# Altium PCB УШЯИ 758727.205.PcbDoc (part 3 of 3)
Units mm, origin at the board's own origin, x right, y up, seen from the top; angles counter-clockwise.
Board outline 230 x 150 mm, 2 copper layers (Top Layer, Bottom Layer), stack 1.57 mm thick; 312 components, 192 nets, 1030 pads, 332 vias.
Unrouted connection lines stored in the file: 2.
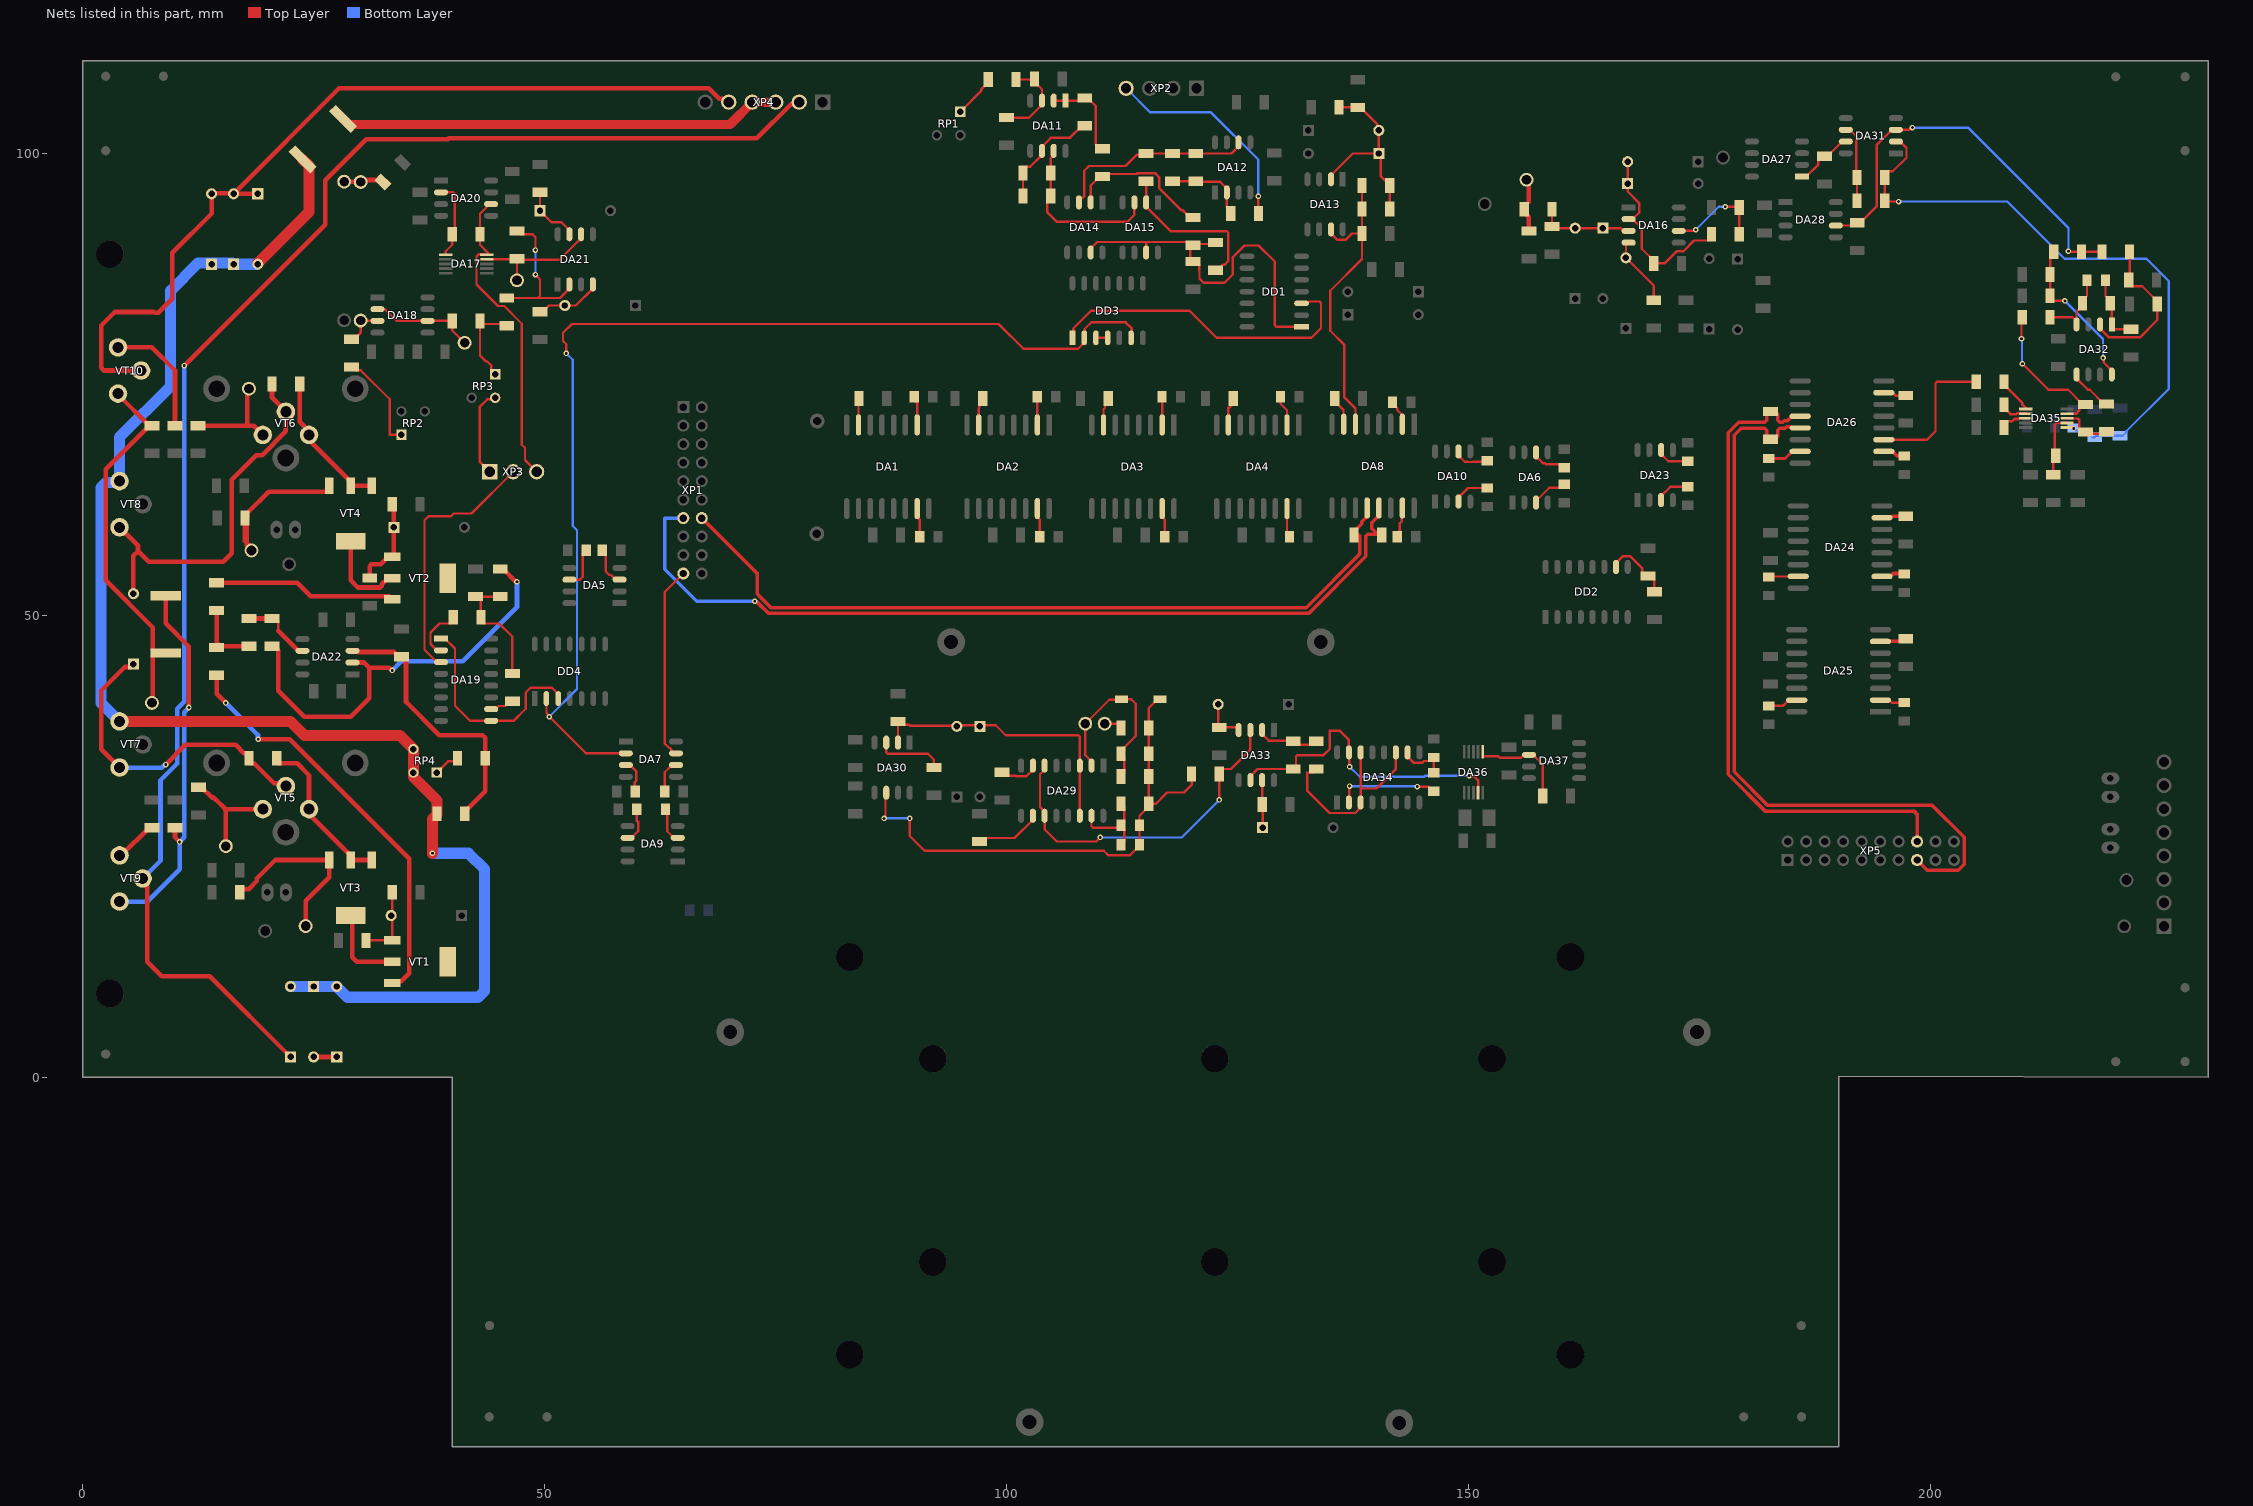
[diagram p3: the nets of this part, all layers, seen from the top]

## Via types
v1: diameter 0.6, hole 0.3, Top Layer to Bottom Layer, 328 vias
v2: diameter 0.5, hole 0.3, Top Layer to Bottom Layer, 3 vias
v3: diameter 1.6, hole 0.9, Top Layer to Bottom Layer, 1 vias

## Nets (pads, with @x,y where several pads share a name; then routed paths per layer and width w, separated by ;. In a path a pad name is that pad's centre, name@x,y a point inside that pad or via, vN(x,y) a via of type N, cw(c..) or ccw(c..) an arc to the next point about the centre after c; other vN are vias at no path point) (continued)
LINE: C24.2 DA8.6 DA13.7 R16.2 R19.1 | length 32.8
  Top Layer w0.254: DA13.7@135.081,91.736 135.081,91.299 135.783,90.597 136.641,90.597 137.343,91.299 R19.1@138.446,91.299 ; DA8.6@137.73,70.649 137.73,72.345 136.535,73.54 136.535,79.227 135,80.763 135,85.086 138.446,88.532 R19.1@138.446,91.299 ; C24.2@138.446,96.493 R16.2@138.446,93.948 R19.1@138.446,91.299
LINE+: DA8.12 R9.1 XP1.14 | length 85.3
  Top Layer w0.381: XP1.14@67,60.5 73,54.5 73,52.3 73.351,51.949 74.49,50.81 132.412,50.81 138.221,56.619 138.221,58.517 137.998,58.74 R9.1@137.58,58.74 ; DA8.12@139,61.593 139,60.681 138.423,60.103 138.423,59.883 R9.1@137.58,59.04 ; R9.1@137.58,58.74 R9.1@137.58,59.04 ; R9.1@137.58,58.74 R9.1@137.58,59.04
LINE-: DA8.13 R9.2 XP1.13 | length 95.3
  Top Layer w0.381: v1(72.725,51.5) 72.767,51.458 72.944,51.458 73.088,51.314 74.227,50.175 132.675,50.175 138.856,56.356 138.856,58.517 139.08,58.74 140.039,58.74 ; DA8.13@140.27,61.593 140.27,60.735 139.508,59.973 139.508,59.349 139.548,59.349 140.039,58.858 140.039,58.74 ; R9.2@140.58,58.74 140.039,58.74
  Bottom Layer w0.381: XP1.13@65,60.5 63,60.5 63,54.958 63.223,54.735 64.548,53.409 66.458,51.5 v1(72.725,51.5)
Net1: 1.1 R26.2 R27.1 | length 6.1
  Top Layer w0.5: 1.1@156.25,97.109 156.25,96.838 156.482,96.606 156.482,94.699 156,94.217 156,93.617 156.5,93.117 R27.1@156.5,91.558
Net7: 7.1 C75.1 | length 2
  Top Layer w0.254: 7.1@110.595,38.251 111.985,38.251 112.358,37.878 C75.1@112.358,37.796
Net8: 8.1 C74.1 C76.1 DA29.2 R70.1 | length 20.2
  Top Layer w0.254: DA29.2@109.175,33.712 109.175,34.171 108.5,34.846 8.1@108.5,38.251 111.099,40.85 C74.1@112.2,40.85 ; R70.1@112.358,32.546 112.731,32.919 112.731,34.627 C76.1@112.358,35 112.731,35.373 112.731,35.706 113.95,36.925 113.95,40.406 113.481,40.875 C74.1@112.4,40.875
NetC1_1: C1.1 DA1.15 | length 3
  Top Layer w0.254: DA1.15@90.304,61.523 90.304,60.577 90.574,60.307 C1.1@90.574,58.67
NetC2_1: C2.1 DA2.15 | length 3.1
  Top Layer w0.254: DA2.15@103.312,61.523 103.312,60.577 103.582,60.307 C2.1@103.582,58.5
NetC3_1: C3.1 DA3.15 | length 3.1
  Top Layer w0.254: DA3.15@116.82,61.523 116.82,60.577 117.09,60.307 C3.1@117.09,58.5
NetC4_1: C4.1 DA4.15 | length 3.1
  Top Layer w0.254: DA4.15@130.328,61.523 130.328,58.77 C4.1@130.598,58.5
NetC5_1: C5.1 DA1.2 | length 2.8
  Top Layer w0.254: C5.1@90,73.232 90.304,72.929 DA1.2@90.304,70.579
NetC6_1: C6.1 DA2.2 | length 2.4
  Top Layer w0.254: C6.1@103.291,73 103.312,72.979 DA2.2@103.312,70.579
NetC7_1: C7.1 DA3.2 | length 2.6
  Top Layer w0.254: C7.1@116.799,73.132 116.82,73.111 DA3.2@116.82,70.579
NetC8_1: C8.1 DA4.2 | length 2.7
  Top Layer w0.254: C8.1@129.619,73 129.619,72.875 130.328,72.166 DA4.2@130.328,70.579
NetC9_2: C9.2 DA7.6 | length 3.6
  Top Layer w0.254: C9.2@63,30.91 63,33 63.774,33.774 DA7.6@64.212,33.775
NetC10_1: C10.1 DA8.15 | length 2.9
  Top Layer w0.254: C10.1@142.258,58.915 142.54,59.197 142.54,59.936 142.747,60.143 142.747,61.53 DA8.15@142.81,61.593
NetC11_2: C11.2 DA5.3 | length 4.3
  Top Layer w0.254: C11.2@56.226,57.017 56.599,56.644 56.599,54.714 56.982,54.331 57.162,54.331 57.653,53.84 DA5.3@58.106,53.84
NetC12_2: C12.2 DA6.3 | length 3.6
  Top Layer w0.254: DA6.3@157.452,62.538 158.696,63.782 159.965,63.782 C12.2@160.338,64.155
NetC13_2: C13.2 DA7.3 | length 3.7
  Top Layer w0.254: DA7.3@58.788,33.775 59.226,33.774 59.928,33.073 59.928,32.094 59.749,31.916 59.749,30.949 C13.2@59.788,30.91
NetC14_2: C14.2 DA5.6 | length 4.6
  Top Layer w0.254: DA5.6@52.682,53.84 53.826,53.84 54.127,54.141 54.127,56.627 C14.2@54.5,57
NetC15_2: C15.2 DA6.6 | length 4
  Top Layer w0.254: DA6.6@157.268,67.612 157.268,67.175 157.998,66.445 158.224,66.445 158.351,66.318 159.965,66.318 C15.2@160.338,65.945
NetC16_1: C16.1 DA8.2 | length 2.8
  Top Layer w0.254: C16.1@141.749,73.029 141.749,72.904 142.249,72.404 142.249,72.204 142.657,71.796 142.657,71.749 142.81,71.596 DA8.2@142.81,70.649
NetC17_2: C17.2 DA9.3 | length 3.9
  Top Layer w0.254: C17.2@63.064,29 63.258,28.807 63.258,26.602 63.96,25.9 DA9.3@64.397,25.9
NetC18_2: C18.2 DA10.3 | length 4
  Top Layer w0.254: DA10.3@148.885,62.288 148.885,62.726 149.91,63.75 C18.2@152,63.75
NetC19_2: C19.2 DA9.6 | length 3.9
  Top Layer w0.254: DA9.6@58.973,25.9 59.411,25.9 60.113,26.602 60.113,27.621 59.973,27.76 C19.2@59.973,29
NetC20_2: C20.2 DA10.6 | length 3.9
  Top Layer w0.254: DA10.6@148.885,67.712 148.885,67.274 149.559,66.6 149.837,66.6 149.864,66.572 150.446,66.572 150.473,66.6 151.888,66.6 C20.2@152,66.712
NetC21_2: C21.2 DA11.3 R11.1 R12.1 | length 9.6
  Top Layer w0.254: C21.2@99.986,103.846 100.01,103.821 102.409,103.821 103.811,105.223 103.811,106.89 103,107.7 R11.1@103,108 102.923,107.923 102.486,107.923 102.46,107.948 R12.1@101,107.948
NetC22_2: C22.2 C24.1 DA13.2 R14.2 R16.1 VD1.2 VD2.1 | length 21.2
  Top Layer w0.254: DA13.2@135.081,97.16 135.081,97.598 137.431,99.948 VD2.1@140.259,99.948 ; C22.2@135.946,104.948 137.96,104.948 R14.2@137.986,104.923 138.286,104.923 140.078,103.131 140.078,102.629 VD1.2@140.259,102.448 VD2.1@140.259,99.948 ; R16.1@141.446,93.948 C24.1@141.446,96.493 140.486,97.453 140.486,99.721 VD2.1@140.259,99.948
NetC23_1: C23.1 DA11.6 R15.2 R18.1 | length 12
  Top Layer w0.254: C23.1@101.756,95.346 101.756,98.146 102.129,98.519 102.53,98.519 103.811,99.799 103.811,100.674 104.513,101.376 104.799,101.662 106.86,101.662 108.146,102.948 R15.2@108.446,102.948
NetC23_2: C23.2 DA11.7 DA15.3 R18.2 | length 18.5
  Top Layer w0.254: DA11.7@105.081,100.236 105.081,99.777 104.756,99.452 C23.2@104.756,95.346 104.371,94.96 104.371,93.629 105.452,92.548 113.048,92.548 113.811,93.311 DA15.3@113.811,94.66
NetC25_1: C25.1 DA12.2 R13.2 R17.1 | length 9.1
  Top Layer w0.254: C25.1@117.946,96.948 R17.1@120.446,96.948 120.518,96.876 123.109,96.876 123.811,96.174 123.811,94.165 124.23,93.745 R13.2@124.23,93.445
NetC25_2: C25.2 DA12.6 DA14.3 R17.2 R21.1 | length 22
  Top Layer w0.254: DA14.3@107.811,94.66 107.811,94.986 107.993,95.169 108.23,95.169 108.379,95.318 108.379,98.08 108.899,98.6 112.848,98.6 114.048,99.801 114.933,99.801 R21.1@115.081,99.948 C25.2@117.946,99.948 R17.2@120.446,99.948 124.306,99.948 125.081,100.723 DA12.6@125.081,101.16
NetC28_2: C28.2 DA16.3 R26.1 VD3.2 VD4.1 | length 10.3
  Top Layer w0.254: R26.1@159,93.917 C28.2@159,92.058 159.283,92.058 159.47,91.871 VD3.2@161.5,91.871 VD4.1@164.5,91.871 166.445,91.871 166.743,91.573 DA16.3@167.288,91.573
NetC29_2: C29.2 DD2.10 R25.2 | length 7.5
  Top Layer w0.254: DD2.10@165.925,55.212 165.925,55.65 166.627,56.352 167.486,56.352 168.781,55.056 168.781,54.598 169.154,54.225 169.675,54.225 170.048,53.852 170.048,52.581 C29.2@170.1,52.529
NetC30_1: C30.1 DA16.2 R28.1 VD5.1 VD6.2 | length 20.9
  Top Layer w0.254: VD6.2@167.187,99.058 VD5.1@167.187,96.694 167.187,95.835 168.428,94.594 168.428,93.545 DA16.2@167.726,92.843 ; DA16.2@167.288,92.843 DA16.2@167.726,92.843 ; C30.1@176.25,91.2 176.25,90.9 175.877,90.527 174.366,90.527 173.198,89.358 172.467,89.358 171.167,88.058 R28.1@170,88.058 170,88.358 168.714,89.644 168.714,91.854 DA16.2@167.726,92.843
NetC30_2: C30.2 DA16.6 R30.1 | length 10.3
  Top Layer w0.254: DA16.6@172.712,91.573 174.424,91.573 v1(174.551,91.7) ; v1(177.75,94.191) 179.172,94.191 R30.1@179.25,94.113 C30.2@179.25,91.476
  Bottom Layer w0.254: v1(174.551,91.7) 177.042,94.191 v1(177.75,94.191)
NetC32_2: C32.2 C33.2 R32.2 | length 4.9
  Top Layer w0.254: C32.2@27.85,97 C32.2@27.967,96.883 ; C33.2@30.025,96.925 C33.2@30.177,97.077 ; C33.2@30.069,96.883 C33.2@30.086,96.865 ; R32.2@32.288,97.077 R32.2@32.5,96.865
  Top Layer w0.5: C32.2@27.967,96.883 C33.2@30.069,96.883 ; C33.2@30.177,97.077 R32.2@32.288,97.077
NetC33_1: C33.1 DA18.3 R33.2 | length 4.4
  Top Layer w0.254: R33.2@29.1,79.85 29.4,79.85 30.086,80.536 C33.1@30.086,81.865 30.102,81.849 31.89,81.849 DA18.3@31.906,81.834
NetC34_1: C34.1 DA17.1 DA20.2 | length 8.5
  Top Layer w0.254: DA20.2@38.788,95.745 40.109,95.745 40.258,95.596 40.258,91.464 C34.1@40,91.206 40,90.065 39.298,89.363 39.298,89.023 DA17.1@39.275,89
NetC34_2: C34.2 DA17.10 DA20.6 XP3.3 | length 34
  Top Layer w0.254: DA17.10@43.478,89.027 42.844,89.027 42.623,88.806 42.623,85.769 44.95,83.443 45.616,83.443 47.526,81.533 47.526,68.441 47.866,68.101 47.866,66.78 XP3.3@49.136,65.51 ; DA17.10@43.725,89 43.851,89 43.828,89.023 43.828,89.236 43,90.065 C34.2@43,91.206 43,93.429 43.699,94.128 43.699,94.292 43.882,94.475 DA20.6@44.212,94.475
NetC37_1: C37.1 R34.2 R35.2 R39.1 | length 13.8
  Top Layer w0.254: R39.1@45.189,52 C37.1@42.727,52 ; R35.2@46.51,43.669 46.51,47.656 45.072,49.094 43.473,49.094 43.1,49.467 43.1,51.627 C37.1@42.727,52 ; C37.1@42.727,52 C37.1@42.5,52 C37.1@42.727,52
NetC38_2: C38.2 DA21.7 VD10.1 | length 6.5
  Top Layer w0.254: C38.2@49.495,95.745 VD10.1@49.495,93.756 50.747,92.504 51.818,92.504 52.673,91.649 DA21.7@52.673,91.212
NetC39_1: C39.1 DA22.2 R39.2 | length 46.5
  Top Layer w0.5: C39.1@20.5,46.635 20.8,46.635 21.173,46.262 21.173,41.827 23.996,39.004 29.004,39.004 31,41 31,44.32 ; DA22.2@29.212,44.865 30.455,44.865 31,44.32 ; v1(33.5,44.007) 33.473,44.007 33.16,44.32 31,44.32 ; R39.2@45.189,55 45.489,55 46.879,53.61 v1(47,53.61)
  Bottom Layer w0.5: v1(33.5,44.007) 34.493,45 41.154,45 47,50.846 v1(47,53.61)
NetC39_2: C39.2 DA22.6 R43.1 | length 7.8
  Top Layer w0.254: C39.2@20.5,49.635 20.8,49.635 21.173,49.262 21.173,48.313 ; DA22.6@23.35,46.135 DA22.6@23.788,46.135
  Top Layer w0.5: R43.1@18,49.635 C39.2@20.5,49.635 ; 21.173,48.313 DA22.6@23.35,46.135
NetC40_2: C40.2 DA21.4 VD11.2 | length 7.2
  Top Layer w0.254: C40.2@49.5,82.82 49.8,82.82 50.48,83.5 53.362,83.5 55.213,85.351 DA21.4@55.213,85.788
NetC41_1: C41.1 DA22.3 R37.2 R40.1 | length 30.1
  Top Layer w0.5: DA22.3@29.212,46.135 29.649,46.135 29.784,46 33.7,46 34.2,45.5 R37.2@34.5,45.5 34.627,45.5 35,45.127 35,40.599 38.6,37 43.268,37 43.561,36.707 R40.1@43.561,34.5 43.561,30.946 41.664,29.05 41.59,29.05 41.34,28.8 C41.1@41.34,28.5
NetC41_2: C41.2 R56.1 RP4.2 RP4.3 VD15.2 VD16.1 VD17.2 VD18.1 VD19.1 VD20.2 VT7.3 VT8.3 | length 162.7
  Top Layer w1.2: VT7.3@4,38.5 22.5,38.5 24.02,36.98 34.32,36.98 RP4.3@35.8,35.5 RP4.2@35.8,32.96 35.8,32.465 38.34,29.925 38.34,28.44 37.85,27.95 v1(37.85,24.226) ; VD20.2@18.955,88.085 24.48,93.61 24.48,98.636 R56.1@23.808,99.308
  Bottom Layer w1.2: VT7.3@4,38.5 2,40.5 2,63.797 2.55,64.347 3.847,64.347 VT8.3@4,64.5 4,69.256 9.5,74.756 9.5,85.094 12.491,88.085 13.955,88.085 16.217,88.085 VD18.1@16.338,87.964 18.834,87.964 VD20.2@18.955,88.085 ; VD17.2@22.5,9.813 VD19.1@25,9.813 VD15.2@27.5,9.813 28.669,8.644 42.797,8.644 43.5,9.347 43.5,22.5 41.774,24.226 v1(37.85,24.226)
NetC44_1: C44.1 R42.2 VD12.2 VT1.1 | length 8.1
  Top Layer w0.254: R42.2@30.678,14.8 VT1.1@33.5,14.8 VD12.2@33.5,17.487 ; VD12.2@33.387,17.487 33.5,17.6 C44.1@33.5,20
NetC45_2: C45.2 R44.2 VD13.1 VT2.1 | length 10
  Top Layer w0.5: R44.2@31.072,54 31.072,55.312 31.251,55.49 32.24,55.49 33.05,56.3 VT2.1@33.5,56.3 33.687,56.487 VD13.1@33.687,59.5 33.687,61.813 C45.2@33.5,62
NetC48_1: C48.1 VT1.2 VT1.4 VT3.1 VT3.2 VT3.4 VT5.1 | length 26.9
  Top Layer w0.5: C48.1@21,34.5 21,34.25 21.25,34 21.25,33.95 23.207,33.95 24.5,32.657 VT5.1@24.5,29 24.787,28.713 24.787,28.163 29,23.95 VT3.2@29,23.5 VT3.1@31.3,23.5 ; VT3.4@29,17.5 29.182,17.318 29.182,15.311 29.178,15.306 29.178,13.394 29.182,13.39 29.182,12.969 29.651,12.5 VT1.2@33.5,12.5
NetC48_2: C48.2 VD14.1 VT5.2 VT7.1 | length 35.1
  Top Layer w0.5: VT7.1@4,33.5 2,35.5 2,41.845 4.541,44.385 5.199,44.385 VD14.1@5.5,44.687 ; v1(9,33.827) 11.123,35.95 16.55,35.95 17.45,35.05 17.75,35.05 18,34.8 C48.2@18,34.5 18,34.2 18.25,33.95 18.55,33.95 20.713,31.787 21.713,31.787 VT5.2@22,31.5
  Bottom Layer w0.5: VT7.1@4,33.5 8.579,33.5 8.906,33.827 v1(9,33.827)
NetC49_1: C49.1 VT2.2 VT2.4 VT4.1 VT4.2 VT4.4 VT6.1 | length 25.2
  Top Layer w0.5: C49.1@23.5,75 23.5,70.906 24.5,69.906 VT6.1@24.5,69.5 24.834,69.166 24.834,68.616 29,64.45 VT4.2@29,64 VT4.1@31.3,64 ; VT4.4@29,58 29,53.762 29.777,52.985 32.219,52.985 32.368,53.134 32.368,53.318 33.05,54 VT2.2@33.5,54
NetC49_2: C49.2 VD14.2 VT6.2 VT8.1 | length 41
  Top Layer w0.5: VT8.1@4,59.5 6,57.5 6,56.925 ; VD14.2@5.5,52.313 5.5,56.425 6,56.925 ; C49.2@20.5,75 20.5,73.5 VT6.2@22,72 22,69.879 19.421,67.299 18.792,67.299 16.155,64.662 16.155,56.697 15.228,55.77 7.155,55.77 6,56.925
NetC52_2: C52.2 DA23.3 | length 3.7
  Top Layer w0.254: DA23.3@170.803,62.438 170.803,62.875 171.803,63.875 C52.2@173.668,63.875
NetC53_1: C53.1 DA24.15 | length 2.9
  Top Layer w0.25: C53.1@182.788,54.121 182.852,54.186 DA24.15@185.642,54.186
NetC54_1: C54.1 DA25.15 | length 3
  Top Layer w0.254: C54.1@182.74,40.176 183.998,40.176 184.622,40.8 DA25.15@185.48,40.8
NetC55_1: C55.1 DA26.15 | length 3
  Top Layer w0.3: 183.127,66.933 184.216,66.933 184.993,67.71 DA26.15@185.851,67.71
NetC56_2: C56.2 DA23.6 | length 3.6
  Top Layer w0.25: DA23.6@170.803,67.862 170.803,67.425 171.577,66.65 C56.2@173.668,66.65
NetC57_1: C57.1 DA25.2 | length 3
  Top Layer w0.254: DA25.2@194.536,40.8 195.483,40.8 195.753,40.53 197.405,40.53 C57.1@197.425,40.55
NetC58_1: C58.1 DA26.2 | length 2.9
  Top Layer w0.381: DA26.2@194.907,67.71 195.819,67.71 196.304,67.225 C58.1@197.625,67.225
NetC59_1: C59.1 DA24.2 | length 3
  Top Layer w0.381: DA24.2@194.698,54.186 195.61,54.186 195.924,54.5 197.45,54.5 C59.1@197.5,54.45
NetC64_1: 
NetC64_2: 
NetC65_1: 
NetC65_2: 
NetC66_2: C71.2 DA29.3 DA29.14 DA30.2 VD23.1 VD24.2 | length 31.4
  Top Layer w0.254: DA30.2@88.23,36.213 C71.2@88.23,38.5 88.603,38.127 89.443,38.127 89.538,38.032 94.527,38.032 VD24.2@94.595,37.963 94.708,38.077 VD23.1@97.095,38.077 ; VD23.1@97.095,37.963 VD23.1@97.095,38.077 ; DA29.14@107.905,28.288 DA29.3@107.905,33.712 107.905,36.851 107.756,37 99.881,37 98.804,38.077 VD23.1@97.095,38.077
NetC68_2: 
NetC70_1: C70.1 DA27.1 DA31.7 | length 6.6
  Top Layer w0.254: DA27.1@186.058,97.44 186.495,97.44 187.827,98.772 187.827,99.272 188.2,99.645 C70.1@188.5,99.645 188.8,99.645 190.396,101.241 DA31.7@190.788,101.241
NetC72_2: C72.2 DA28.6 DA31.3 R72.1 R73.1 | length 44.1
  Top Layer w0.254: DA28.6@189.707,92.15 191.709,92.15 192.001,92.441 C72.2@192.038,92.441 192.338,92.441 194.123,94.226 194.123,100.86 195.774,102.511 DA31.3@196.212,102.511 197.668,102.511 197.906,102.75 v1(198,102.75) ; v1(214.879,89.367) 214.922,89.323 R73.1@216.295,89.323 R72.1@218.5,89.323
  Bottom Layer w0.254: v1(198,102.75) 204,102.75 214.879,91.871 v1(214.879,89.367)
NetC73_1: C73.1 C87.2 C89.2 C92.2 DA31.2 DA35.1 R74.2 | length 67.6
  Top Layer w0.254: DA31.2@196.212,101.241 196.649,101.241 197.351,100.539 197.351,99.49 195.879,98.018 195.373,98.018 195,97.645 C73.1@195,97.345 R74.2@195,94.845 195.095,94.75 v1(196.5,94.75)
  Bottom Layer w0.254: v1(196.5,94.75) 208.25,94.75 214.452,88.548 223.318,88.548 225.75,86.117 225.75,74.5 221.133,69.883 221.133,69.773 220.76,69.4 217.881,69.4 C92.2@217.731,69.25 217.431,69.25 216.699,69.982 215.663,69.982 C87.2@215.395,70.25 215.179,70.25 C87.2@215.175,70.246
  other v2: 215.45,70.196
NetC73_2: C73.2 DA31.6 R74.1 | length 8.4
  Top Layer w0.254: DA31.6@190.788,102.511 191.225,102.511 191.927,101.809 191.927,97.418 C73.2@192,97.345 R74.1@192,94.845
NetC74_2: C74.2 C75.2 C76.2 C77.2 C78.2 DA30.6 R70.2 R71.2 R77.1 | length 57.1
  Top Layer w0.254: v1(86.73,28.001) 86.884,28.155 86.884,30.713 DA30.6@86.96,30.789 ; v1(89.5,28.001) 89.5,26.096 91.096,24.5 110.5,24.5 111,24 113.358,24 113.358,24.037 114.358,25.037 C78.2@114.358,25.162 C77.2@114.358,27.267 114.358,28.292 115.358,29.292 R71.2@115.358,29.592 ; 116.095,29.592 R71.2@115.358,29.592 ; 116.14,29.592 117.35,30.802 119.181,30.802 120,31.621 R77.1@120,32.802 ; C74.2@116.475,40.725 116.15,40.725 115.358,39.933 C75.2@115.358,37.796 C76.2@115.358,35 R70.2@115.358,32.546 R71.2@115.358,29.592
  Bottom Layer w0.254: v1(86.73,28.001) v1(89.5,28.001)
NetC77_1: C77.1 C78.1 DA29.15 R71.1 | length 9.5
  Top Layer w0.254: DA29.15@109.175,28.288 109.175,27.149 109.324,27 112.092,27 C77.1@112.358,27.267 ; C78.1@112.358,25.162 112.731,25.535 112.731,26.894 C77.1@112.358,27.267 ; R71.1@112.358,29.592 112.731,29.219 112.731,27.639 C77.1@112.358,27.267
NetC81_1: C81.1 DA32.2 R72.2 R75.1 | length 17.2
  Top Layer w0.254: DA32.2@218.299,81.462 218.299,81.024 219.271,80.053 222.619,80.053 224.495,81.929 C81.1@224.495,83.65 224.495,83.95 222.868,85.577 221.768,85.577 221.395,85.95 R75.1@221.395,86.25 221.5,86.355 R72.2@221.5,89.323
NetC82_2: C82.2 DA32.8 R73.2 R76.2 | length 16.9
  Top Layer w0.254: R73.2@213.09,89.408 213.09,88.818 212.895,88.623 R76.2@212.895,86.85 C82.2@212.895,84.55 212.895,84.373 213.268,84 v1(214.5,84) ; v1(218.624,77.83) 218.69,77.764 218.69,77.354 219.569,76.476 DA32.8@219.569,76.038
  Bottom Layer w0.254: v1(214.5,84) 218.624,79.876 v1(218.624,77.83)
NetC83_1: C83.1 DA32.1 R78.2 R80.1 | length 7.6
  Top Layer w0.254: C83.1@218.895,86.25 218.895,84.55 219.395,84.05 R80.1@219.395,83.75 219.569,83.576 DA32.1@219.569,81.462 219.569,81.128 219.767,80.93 R78.2@221.663,80.93
NetC83_2: C83.2 DA32.4 R80.2 R86.1 | length 8.3
  Top Layer w0.254: R86.1@212.895,82.224 215.327,82.224 DA32.4@215.759,81.792 ; DA32.4@215.759,81.462 DA32.4@215.759,81.792 ; C83.2@216.895,86.25 216.895,84.55 216.395,84.05 R80.2@216.395,83.75 216.395,83.45 215.759,82.814 DA32.4@215.759,81.792
NetC84_2: C84.2 DA33.4 VD26.2 | length 4.8
  Top Layer w0.254: VD26.2@122.877,40.347 122.877,37.97 C84.2@123,37.847 124.912,37.847 125.095,37.664 DA33.4@125.095,37.559
NetC85_2: C85.2 DA33.7 VD25.1 | length 5.2
  Top Layer w0.254: DA33.7@127.635,32.135 C85.2@127.635,29.5 127.687,29.448 VD25.1@127.687,27
NetC86_1: C86.1 DA33.2 R79.1 | length 6.9
  Top Layer w0.254: DA33.2@127.635,37.559 127.635,37.121 128.341,36.415 130.932,36.415 C86.1@131,36.347 131.3,36.347 131.673,35.974 132.627,35.974 ; 132.627,35.974 133.127,35.974 R79.1@133.5,36.347
NetC86_2: C86.2 DA33.6 DA34.15 DA36.9 | length 34.4
  Top Layer w0.254: DA33.6@126.365,32.135 126.365,32.572 127.139,33.347 131.3,33.347 131.3,34.698 131.449,34.847 134.275,34.847 134.947,35.519 134.947,37.5 135.991,37.5 137.022,36.468 DA34.15@137.022,35.15 137.098,35.074 137.06,35.037 137.06,33.637 v1(137.098,33.599) ; v1(150.049,32.606) 150.115,32.54 150.577,32.54 151,32.118 DA36.9@151,30.775
  Bottom Layer w0.254: v1(137.098,33.599) 138.197,32.5 145.157,32.5 145.263,32.606 v1(150.049,32.606)
NetC90_1: C90.1 DA35.4 R86.2 | length 16.1
  Top Layer w0.254: v1@209.795,79.893 v1(209.8,79.897) 209.8,82.129 R86.2@209.895,82.224 ; v1(209.895,77.191) 212.713,74.373 214.858,74.373 C90.1@216.431,72.8 ; DA35.4@214.725,71.796 215.205,71.796 215.232,71.769 215.7,71.769 216.058,72.127 216.058,72.427 C90.1@216.431,72.8 ; C90.1@216.731,72.8 C90.1@216.431,72.8
  Bottom Layer w0.254: v1(209.8,79.897) 209.848,79.85 209.848,77.239 v1(209.895,77.191)
NetC90_2: C90.2 DA35.3 R83.2 | length 5.6
  Top Layer w0.254: DA35.3@214.725,71.296 214.992,71.296 215.023,71.265 215.879,71.265 215.894,71.25 215.945,71.25 216.058,71.137 216.058,70.173 216.431,69.8 C90.2@216.731,69.8 216.895,69.637 218.786,69.637 R83.2@219,69.85
NetC93_1: C93.1 DA35.2 R88.1 | length 7
  Top Layer w0.254: C93.1@213.229,65.176 213.229,66.979 R88.1@213.5,67.25 213.395,67.355 213.395,70.601 213.59,70.796 DA35.2@214.725,70.796
NetC96_1: C96.1 DA36.1 DA37.2 | length 10.4
  Top Layer w0.254: 151.65,34.721 153.17,34.721 153.334,34.556 155.637,34.556 155.969,34.888 DA37.2@156.513,34.888 156.951,34.888 158,33.838 C96.1@158,30.437
NetDA1_7: DA1.7 R5.2 | length 2.7
  Top Layer w0.254: DA1.7@83.954,70.579 83.954,73.171 R5.2@84.015,73.232
NetDA2_7: DA2.7 R6.2 | length 2.8
  Top Layer w0.254: DA2.7@96.962,70.579 96.962,72.351 97.025,72.414 97.025,72.859 R6.2@97.398,73.232
NetDA3_7: DA3.7 R7.2 | length 3
  Top Layer w0.254: DA3.7@110.47,70.579 110.47,72.28 110.627,72.437 110.627,73.005 R7.2@110.991,73.369
NetDA4_7: DA4.7 R8.2 | length 2.8
  Top Layer w0.254: DA4.7@123.978,70.579 123.978,72.424 124.013,72.459 124.126,72.459 124.499,72.832 R8.2@124.499,73.132
NetDA8_7: DA8.7 R10.2 | length 3.2
  Top Layer w0.254: R10.2@135.481,73.427 135.481,73.127 136.429,72.179 136.429,70.68 DA8.7@136.46,70.649
NetDA11_1: DA11.1 DA11.2 R15.1 R20.1 | length 10.1
  Top Layer w0.254: DA11.2@105.081,105.66 DA11.1@106.351,105.66 108.158,105.66 R15.1@108.446,105.948 108.746,105.948 109.623,105.071 109.623,100.956 109.678,100.901 109.678,100.821 110.051,100.448 R20.1@110.351,100.448
NetDA14_2: DA14.2 R20.2 R22.1 | length 16.1
  Top Layer w0.254: DA14.2@109.081,94.66 109.081,96.478 110.051,97.448 R20.2@110.351,97.448 110.626,97.723 114.022,97.723 114.124,97.825 116.037,97.825 116.486,97.377 116.486,96.211 118.902,93.794 119.075,93.794 119.848,93.021 R22.1@120.148,93.021
NetDA14_7: DA14.7 DA15.7 DD1.1 R22.2 R23.2 R24.1 | length 41.7
  Top Layer w0.254: DA14.7@109.081,89.236 109.081,89.674 109.783,90.376 114.944,90.376 ; DA15.7@115.081,89.236 115.081,90.239 114.944,90.376 ; R23.2@122.586,90.31 122.424,90.148 120.275,90.148 R22.2@120.148,90.021 ; DD1.1@131.9,81.19 129.177,81.19 129,81.367 129,88.252 127.252,90 125.733,90 124.471,88.739 124.471,86.878 123.563,85.97 121.299,85.97 120.848,86.421 120.848,87.242 120.821,87.269 120.821,87.877 120.448,88.25 R24.1@120.148,88.25 119.848,88.55 119.848,89.721 R22.2@120.148,90.021 ; 114.944,90.376 119.793,90.376 R22.2@120.148,90.021
NetDA15_2: DA15.2 R21.2 R23.1 | length 17.7
  Top Layer w0.254: R21.2@115.081,96.948 DA15.2@115.081,94.66 115.081,94.223 117.783,91.521 123.818,91.521 123.967,91.372 123.967,88.303 123.563,87.899 123.363,87.899 123.259,87.794 123.259,87.683 122.886,87.31 R23.1@122.586,87.31
NetDA16_4: DA16.4 R29.2 VD7.2 | length 7.7
  Top Layer w0.254: DA16.4@167.288,90.303 167.183,90.303 167,90.12 VD7.2@167,88.658 170,85.658 R29.2@170,84.065
NetDA17_9: DA17.9 DA21.6 KT5.1 R41.1 | length 13.8
  Top Layer w0.254: DA17.9@43.725,88.5 R41.1@46.935,88.5 ; KT5.1@47,86.226 47,88.282 R41.1@47.141,88.423 ; R41.1@47,88.565 47.1,88.465 51.633,88.465 53.943,90.774 DA21.6@53.943,91.212
NetDA18_2: DA18.2 DA18.6 KT4.1 R36.2 | length 11.5
  Top Layer w0.254: DA18.2@31.906,83.104 32.725,83.104 33.995,81.834 DA18.6@37.33,81.834 R36.2@40,81.834 40,80.8 KT4.1@41.335,79.465
NetDA19_1: DA19.1 DA19.9 DD4.3 | length 23.3
  Top Layer w0.254: DA19.1@38.788,47.445 39.226,47.445 40.3,46.371 40.3,40.2 41.945,38.555 DA19.9@44.212,38.555 46.623,38.555 47.943,39.875 47.943,41.625 48.464,42.146 50.783,42.146 51.46,41.469 DD4.3@51.46,40.969
NetDA19_2: DA19.2 R34.1 | length 6
  Top Layer w0.254: DA19.2@38.788,46.175 38.35,46.175 37.648,46.877 37.648,48.127 38.615,49.094 39.727,49.094 40.1,49.467 R34.1@40.1,49.767
NetDA19_3: DA19.3 XP3.2 | length 28.1
  Top Layer w0.254: DA19.3@38.788,44.905 38.35,44.905 37,46.256 37,60.26 37.434,60.694 39.868,60.694 40.17,60.995 42.081,60.995 XP3.2@46.596,65.51
NetDA19_10: DA19.10 R35.1 | length 2.6
  Top Layer w0.254: DA19.10@44.212,39.825 44.653,39.825 44.996,40.169 45.71,40.169 46.21,40.669 R35.1@46.51,40.669
NetDA21_2: DA21.2 R38.1 R41.2 | length 16.8
  Top Layer w0.254: R38.1@45.906,84.32 49.265,84.32 ; R41.2@47,91.565 47.373,91.192 48.703,91.192 49,90.895 v1(49,89.5) ; v1(49,86.85) 49.5,86.35 49.5,84.555 49.265,84.32 ; DA21.2@52.673,85.788 52.673,85.351 51.642,84.32 49.265,84.32
  Bottom Layer w0.254: v1(49,86.85) v1(49,89.5)
NetDA24_7: DA24.7 R60.2 | length 3
  Top Layer w0.381: DA24.7@194.698,60.536 195.61,60.536 195.765,60.691 197.666,60.691 R60.2@197.675,60.7
NetDA25_7: DA25.7 R61.2 | length 3.2
  Top Layer w0.381: DA25.7@194.536,47.15 194.575,47.189 197.339,47.189 R61.2@197.6,47.45
NetDA26_7: DA26.7 R62.2 | length 2.5
  Top Layer w0.25: DA26.7@194.907,74.06 195.855,74.06 196.164,73.751 197.251,73.751 R62.2@197.275,73.775
NetDA29_6: DA29.6 DA29.11 DA33.3 R77.2 | length 38.1
  Top Layer w0.254: DA29.6@104.095,33.712 104.095,33.274 103.595,32.775 103.595,29.226 104.095,28.725 104.095,26.825 105.416,25.504 109.682,25.504 v1(110.12,25.942) ; v1(123,30) 123,32.502 123,32.974 123.373,33.347 124.267,33.347 126.365,35.445 DA33.3@126.365,37.559
  Bottom Layer w0.254: v1(110.12,25.942) 118.942,25.942 v1(123,30)
NetDA29_7: DA29.7 R81.1 | length 4.2
  Top Layer w0.254: R81.1@99.5,33 99.8,33 100.173,32.627 100.982,32.627 101.037,32.573 102.123,32.573 102.825,33.274 DA29.7@102.825,33.712
NetDA29_10: DA29.10 R82.1 | length 7.2
  Top Layer w0.254: R82.1@97.05,25.5 97.5,25.5 97.873,25.873 100.835,25.873 102.825,27.863 DA29.10@102.825,28.288
NetDA30_3: DA30.3 R69.2 | length 7.4
  Top Layer w0.254: DA30.3@86.96,36.213 86.96,35.153 87.109,35.004 91.473,35.004 92.095,34.382 92.095,33.532 R69.2@92.126,33.501
NetDA32_5: DA32.5 R83.1 | length 4.5
  Top Layer w0.254: DA32.5@215.759,76.038 215.759,75.601 216.986,74.374 217.176,74.374 R83.1@218.7,72.85
NetDA34_2: DA34.2 R84.2 | length 11.1
  Top Layer w0.254: DA34.2@137.022,29.726 137.06,29.764 137.06,31.462 v1(137.098,31.5) ; v1(144.413,31.438) 145.572,31.438 146.072,30.938 R84.2@146.197,30.938
  Bottom Layer w0.254: v1(137.098,31.5) 137.129,31.469 144.382,31.469 v1(144.413,31.438)
NetDA34_3: DA34.3 DA34.11 DA34.14 R79.2 | length 22.6
  Top Layer w0.254: R79.2@133.5,33.347 133.127,32.974 132.5,32.974 132.5,31.015 134.932,28.583 137.714,28.583 138.063,28.932 138.063,28.952 138.292,29.182 138.292,31.238 ; DA34.14@138.292,35.15 138.292,31.238 ; DA34.11@142.102,35.15 142.102,33.336 140.005,31.238 138.292,31.238
NetDA34_10: DA34.10 R84.1 R85.2 | length 5.4
  Top Layer w0.254: DA34.10@143.372,35.15 143.372,34.713 144.078,34.007 144.935,34.007 145.143,34.215 145.824,34.215 R85.2@146.197,34.588 R84.1@146.197,32.938
NetDA35_6: DA35.6 R91.1 | length 3.9
  Top Layer w0.254: R91.1@207.895,75.25 207.895,74.95 209.895,72.95 209.895,72.777 210.252,72.42 210.252,72.319 DA35.6@210.275,72.296
NetDA35_7: DA35.7 R90.1 | length 3
  Top Layer w0.254: R90.1@207.895,72.75 207.895,72.45 208.595,71.75 209.252,71.75 209.324,71.823 210.275,71.823 DA35.7@210.275,71.796
NetDA35_8: DA35.8 R89.1 | length 3
  Top Layer w0.254: R89.1@207.895,70.296 207.895,70.596 208.268,70.969 208.783,70.969 209.06,71.246
  Top Layer w0.3: 209.06,71.223 209.47,71.223 209.543,71.296 DA35.8@210.275,71.296
NetDD1_3: DD1.3 DD3.1 | length 35.3
  Top Layer w0.254: DD3.1@107.112,80 107.19,80.078 107.19,81 109.114,82.924 119.78,82.924 122.704,80 132.961,80 134,81.039 134,83.783 133.851,83.931 132.695,83.931 132.494,83.73 DD1.3@131.9,83.73
NetDD3_3: DD3.3 DD3.4 | length 1.3
  Top Layer w0.254: DD3.3@109.652,80 DD3.4@110.922,80
NetKT7: KT7.1 R48.2 VT4.3 | length 18.5
  Top Layer w0.5: R48.2@17.573,60.5 17.573,57.971 17.878,57.666 18.273,57.271 KT7.1@18.273,57 18.138,57.135 17.743,57.53 17.743,60.5 17.823,60.58 17.823,61.05 20.123,63.35 26.5,63.35 26.7,63.55 VT4.3@26.7,64
NetKT8: KT8.1 R49.1 VT5.3 | length 12
  Top Layer w0.5: R49.1@12.55,31.375 12.85,31.375 13.957,30.268 14.157,30.268 14.375,30.05 14.425,30.05 15.5,28.975 KT8.1@15.5,25 ; 15.4,29 17.175,29 VT5.3@19.5,29
NetKT9: KT9.1 R50.2 VT6.3 | length 11.5
  Top Layer w0.5: R50.2@12.5,70.5 17.83,70.5 ; KT9.1@18,74.5 17.83,74.33 17.83,70.5 ; VT6.3@19.5,69.5 18.5,70.5 17.83,70.5
NetR12_2: R12.2 RP1.1 | length 4.7
  Top Layer w0.254: RP1.1@94.986,104.463 97.226,106.704 97.226,106.875 98,107.648 R12.2@98,107.948
NetR13_1: R13.1 XP2.4 | length 23.3
  Top Layer w0.254: R13.1@127.23,93.445 v1(127.23,95.325)
  Bottom Layer w0.254: XP2.4@112.92,107 115.52,104.4 122.1,104.4 127.23,99.27 v1(127.23,95.325)
NetR33_1: R33.1 RP2.1 | length 10.7
  Top Layer w0.254: R33.1@29.1,76.85 29.473,76.477 30.107,76.477 33.233,73.351 33.233,69.5 RP2.1@34.5,69.5
NetR36_1: R36.1 R38.2 RP3.1 | length 9.7
  Top Layer w0.254: RP3.1@44.64,76.046 44.207,76.479 44.207,77.027 43.79,77.444 43.651,77.444 43,78.094 R36.1@43,81.834 43.334,81.5 45.726,81.5 R38.2@45.906,81.32
NetR40_2: R40.2 RP4.1 | length 2.9
  Top Layer w0.254: RP4.1@38.34,32.96 39.553,34.173 40.233,34.173 R40.2@40.561,34.5
NetR43_2: R43.2 R46.1 R47.2 | length 7.2
  Top Layer w0.5: R47.2@14.5,50.5 14.5,47 14.865,46.635 R43.2@18,46.635
NetR45_2: KT6.1 R45.2 VT3.3 | length 19.6
  Top Layer w0.5: R45.2@17,20 17,20.081 17.25,20.331 17.957,20.331 18.85,21.224 18.85,21.5 20.85,23.5 VT3.3@26.7,23.5 26.7,21.64 24.131,19.071 KT6.1@24.131,16.35
NetR46_2: R46.2 VT1.3 | length 45.2
  Top Layer w0.5: R46.2@14.5,43.5 14.5,41.5 v1(15.5,40.5) ; v1(19,36.577) 22.423,36.577 35.353,23.647 35.353,11.253 34.5,10.4 33.7,10.4 VT1.3@33.5,10.2
  Bottom Layer w0.5: v1(15.5,40.5) 18.981,37.019 18.981,36.596 v1(19,36.577)
NetR47_1: R47.1 VT2.3 | length 19.7
  Top Layer w0.5: R47.1@14.5,53.5 23.212,53.5 24.689,52.023 33.177,52.023 VT2.3@33.5,51.7
NetR51_1: KT10.1 R51.1 R53.2 VT10.1 | length 40.6
  Top Layer w0.5: VT10.1@3.832,73.963 3.832,73.868 R53.2@7.2,70.5 ; R53.2@7.5,70.5 R53.2@7.2,70.5 ; KT10.1@7.5,40.5 7.6,40.6 7.6,45.65 R51.1@7.85,45.9 ; R51.1@9,45.9 R51.1@7.85,45.9 ; R53.2@7.2,70.5 2.5,65.8 2.5,53.757 7.6,48.657 7.6,46.15 R51.1@7.85,45.9
NetR51_2: R51.2 R52.1 VT9.1 | length 40.8
  Top Layer w0.5: R51.2@9,52.1 9,49.1 11.5,46.6 v1(11.5,40) ; R52.1@10,27 10,25.95 v1(10.5,25.45)
  Bottom Layer w0.5: VT9.1@4,19 7,19 10.5,22.5 v1(10.5,25.45) 11,25.95 11,39.5 v1(11.5,40)
NetR54_1: R54.1 VT9.3 | length 4.7
  Top Layer w0.5: VT9.3@4,24 4.2,24 7.2,27 R54.1@7.5,27
NetR55_2: R55.2 VT10.3 | length 13.2
  Top Layer w0.5: VT10.3@3.832,78.963 7.5,78.963 10,76.463 R55.2@10,70.5
NetR56_2: R56.2 XP4.3 XP4.4 | length 48.1
  Top Layer w1: R56.2@28.192,103.692 28.799,103.085 70.045,103.085 XP4.4@72.46,105.5 XP4.3@75,105.5
NetRP3_2: RP3.2 XP3.1 | length 9.5
  Top Layer w0.254: XP3.1@44.056,65.51 42.96,66.606 42.96,72.514 43.787,73.341 44.474,73.341 RP3.2@44.64,73.506
NetVD15_1: VD15.1 VD19.2 | length 2.5
  Top Layer w0.5: VD19.2@25,2.187 VD15.1@27.5,2.187
NetVD16_2: VD16.2 VD18.2 VD20.1 VT10.2 XP4.5 | length 95.3
  Top Layer w0.5: VT10.2@6.332,76.463 2.293,76.463 2,76.756 2,81.335 3.464,82.799 7.701,82.799 7.793,82.707 8.207,82.707 9.718,84.218 9.718,89.218 13.955,93.455 13.955,95.711 14.016,95.651 16.278,95.651 VD18.2@16.338,95.59 ; VD20.1@18.955,95.711 18.834,95.59 VD18.2@16.338,95.59 ; XP4.5@69.92,105.5 69.609,105.5 69.243,105.866 68.888,105.866 67.754,107 27.748,107 VD18.2@16.338,95.59
NetVD17_1: VD17.1 VT9.2 XP4.2 | length 167.5
  Top Layer w0.5: VT9.2@6.5,21.5 6.5,21.094 7,20.594 7,12.5 8.575,10.925 13.762,10.925 VD17.1@22.5,2.187 ; v1(11,77) 26.238,92.238 26.238,97.033 30.705,101.5 39.535,101.5 39.615,101.58 72.954,101.58 76.654,105.28 77.32,105.28 XP4.2@77.54,105.5
  Bottom Layer w0.5: VT9.2@6.5,21.5 8.426,23.426 8.426,32.122 10.25,33.946 10.25,39.881 11,40.631 v1(11,77)
OVLW: DA7.2 DD3.2 DD3.6 DD4.2 | length 122.2
  Top Layer w0.254: DD4.2@50.19,40.969 50.19,39.404 50.434,39.16 50.434,39.066 54.456,35.044 DA7.2@59.139,35.044 ; v1(52.334,78.32) 52.334,79.304 51.987,79.652 51.987,80.543 52.947,81.504 99.117,81.504 101.798,78.823 107.705,78.823 108.382,79.5 DD3.2@108.382,80 108.448,80.066 108.448,80.988 109.137,81.677 112.863,81.677 113.54,81 113.528,80.988 113.528,80.066 DD3.6@113.462,80
  Bottom Layer w0.254: v1(50.5,39) 53.5,42 53.5,59.182 53.028,59.654 53.028,77.626 v1(52.334,78.32)
OVLWn: DA7.7 XP1.19 | length 21
  Top Layer w0.254: DA7.7@64.212,35.045 63.886,35.044 63.703,35.227 63.703,35.464 63.555,35.612 63.484,35.612 63,36.096 63,52.5 XP1.19@65,54.5
RUN_ADU: DA26.3 R91.2 | length 15.6
  Top Layer w0.254: DA26.3@194.907,68.98 199.581,68.98 200.492,69.891 200.492,70.463 200.496,70.467 200.496,75.097 200.649,75.25 R91.2@204.895,75.25
RUN_ADU+: DA26.12 R59.1 XP5.16 | length 72.4
  Top Layer w0.381: DA26.12@185.851,71.52 184.987,71.52 184.486,71.019 184.138,71.019 183.975,70.856 183.659,70.856 183.436,71.079 183.436,71.729 183.127,72.039 182.527,72.039 182.217,71.729 182.217,71.079 181.994,70.856 179.21,70.856 178.083,69.729 178.083,32.769 182.102,28.75 198.219,28.75 198.5,28.469 XP5.16@198.5,25.5
RUN_ADU-: DA26.13 R59.2 XP5.15 | length 82.3
  Top Layer w0.381: DA26.13@185.851,70.25 184.939,70.25 184.804,70.384 184.401,70.384 184.238,70.221 183.659,70.221 183.436,69.998 183.436,69.348 183.127,69.039 182.527,69.039 182.217,69.348 182.217,69.998 181.994,70.221 179.473,70.221 178.718,69.466 178.718,33.032 182.35,29.4 200.142,29.4 203.591,25.952 203.591,23.048 202.952,22.409 199.591,22.409 XP5.15@198.5,23.5
pads on no net: DA1.6 DA1.10 DA1.11 DA1.14 DA2.6 DA2.10 DA2.11 DA2.14 DA3.6 DA3.10 DA3.11 DA3.14 DA4.6 DA4.10 DA4.11 DA4.14 DA8.3 DA8.10 DA8.11 DA8.14 DA12.1 DA12.5 DA12.8 DA13.5 DA13.6 DA14.5 DA14.6 DA15.5 DA15.6 DA16.1 DA16.5 DA16.8 DA17.7 DA18.1 DA18.5 DA18.8 DA19.6 DA19.7 DA19.8 DA19.14 DA19.15 DA19.16 DA20.1 DA20.5 DA20.8 DA21.1 DA21.5 DA21.8 DA22.1 DA22.5 DA22.8 DA24.3 DA24.10 DA24.11 DA24.14 DA25.6 DA25.10 DA25.11 DA25.14 DA26.6 DA26.10 DA26.11 DA26.14 DA27.4 DA27.5 DA28.1 DA28.3 DA28.5 DA28.7 DA28.8 DA30.1 DA30.5 DA30.8 DA31.1 DA31.5 DA31.8 DA32.7 DA33.1 DA33.5 DA33.8 DA34.6 DA34.7 DA34.8 DA36.7 DA37.1 DA37.5 DA37.8 DD1. DD1.4 DD1.5 DD1.6 DD1.8 DD1.9 DD1.10 DD1.11 DD1.12 DD1.13 DD2.1 DD2.9 DD2.15 DD3. DD3.8 DD3.9 DD3.10 DD3.11 DD3.12 DD3.13 DD4. DD4.4 DD4.5 DD4.6 DD4.8 DD4.9 DD4.10 DD4.11 DD4.12 DD4.13 Designator3.2 Designator4.2 Designator7.1 Designator8.1 Designator9.1 Designator10.1 Designator11.1 Designator12.1 Designator13.1 Designator14.1 Designator15.1 Designator16.1 Designator55.1 XP2.3 XP4.1 XP5.1 XP5.2 XP5.3 XP5.4 XP5.5 XP5.18 XP5.19 XP5.20

## Polygon pours and split planes (outlines as drawn)
GND on Bottom Layer "Main_GND" (solid, remove dead copper, pour order 5): 173.25,6.75 173.25,18.711 205.5,18.711 205.5,32.75 204.75,33.5 189,33.5 189,77 190.25,78.25 177.5,78.25 177.5,76.5 175.276,76.5 174.75,75.974 174.75,65.25 166.803,65.25 165.946,66.107 157.498,66.107 157.593,65.895 144.749,65.895 144.354,65.5 143.233,66.621 129.129,66.621 127.75,68 78.75,68 76.25,70 76.25,76.5 73.75,79 59.114,79 59.057,79.057 59,79 55.926,79.074 51.693,74.842 51.693,58.5 52.266,58.5 61.945,48.821 61.945,19 61.973,18.973 61.979,17.5 51,6.5 15.75,6.5 15.75,28.25 15.5,28.5 15.75,28.75 15.75,86.822 33.428,104.5 58.6,104.5 63.1,109 67.547,109 69.25,107.297 69.25,101.795 67.213,99.758 67.492,99.758 67.234,99.5 60.569,99.5 60.569,88.931 62.25,87.25 80,87.25 89.75,77.5 102.048,77.5 102.548,77 102.75,77.202 102.75,77.25 103,77.5 113.613,77.5 113.616,77.503 113.616,87.704 109.831,91.489 109.831,96.748 110.358,97.276 126.351,97.276 126.351,97.36 146.199,97.36 146.809,96.75 154.25,96.75 154.25,94.386 163,94.386 164.076,93.311 164.076,87.345 164.405,87.345 166.904,84.846 169.225,84.846 169.321,84.75 178,84.75 180.11,86.86 180.11,92.106 180.178,92.174 198.292,92.208 199,91.5 199,87.25 218.069,87.25 218.037,87.218 218.204,87.05 225.25,87.05 225.25,76.75 224.5,76 224.5,58.25 224.197,57.947 204.197,57.947 203.25,57 203.25,43.68 215,43.68 215,14.517 214,13.517 214,6.75
GND on Bottom Layer "Main_GND" (solid, pour order 8): 166.875,56.35 157.418,56.35 157.409,56.359 157.284,56.359 157.269,56.35 157.35,45 166.75,45 166.87,45.12 166.87,56.225
GND on Bottom Layer "GND_Under_Defence" (solid, pour order 0): 70,47.15 174.875,47.15 174.87,46.5 174.87,-38.39 174.76,-38.5 70,-38.5
GND on Top Layer "Main_GND" (solid, remove dead copper, pour order 7): 61,22 35.603,22 35.353,22.25 35.353,23.647 23.975,35.025 15,35.025 15,80.5 50.5,80.5 50.5,50.478 50.657,50.512 50.772,50.074 48.37,47.672 48.37,37.806 51.768,34.408 61.194,34.408 61,34.214

## Keep-outs
Keep-Out Layer:
  region: 6.1,94.1 6.1,96.964 6.1,83.978 0,83.978 0,94.1
  region: 5.975,14.164 5.975,10.864 5.975,4.25 0.025,4.25 0.025,14.164
  lines w0.3: 0.166,96.866 13.511,96.866 13.511,109.838 ; 40,-24.103 53,-24.103 53,-40.006 ; 176.866,-40 176.866,-23.849 190,-23.849 ; 216.979,110 216.979,96.655 229.951,96.655 ; 217,0.028 217,13 230.134,13

## Other copper
Top Layer:
  region net GND: 56,33 59.226,32.829 59.226,32.175 58.938,31.61 58.66,31.61 58.66,30.534 58.473,30.347 58.473,30.21 57.775,30.21 57.65,30.085 55.991,30.085
Bottom Layer:
  rectangle net GND: 60.075,17.3 66.2,18.729
  rectangle net GND: 67.175,17.446 70.35,18.675
  pour cut-out: 32.7,43.9 32.7,47.25 32.225,47.725 32.725,48.225 41.15,48.225 45.875,52.95 46.85,52.95 46.85,51.3 45.36,49.81 45.36,49.207 44.982,49.207 41.125,45.35 41.125,43.9 38.4,43.9 33.85,44.25 33.75,44.15
  pour cut-out: 43.35,85.575 41.725,83.95 40.925,83.95 40.925,82.85 49.275,74.5 51.975,74.5 52.1,74.375 52.643,74.918 52.643,78.057 51.05,79.65 48.1,79.65 44.225,84.85
  pour cut-out: 14.876,96.899 8.899,96.899 0.024,96.899 0.024,0.158 0,0.134 0.134,0 14.876,0

## Silkscreen, mask and mechanical layers (free items; w line width, h text height)
Top Overlay:
  drawing of 41 lines, arcs and shapes, not listed
  text "XS1" at 152.371,83.679 h2 r45
  text "ВЫХОД" at 79.55,6.114 h2.5 r317.07
  text "ВХОД" at 72.802,-18.384 h2.5 r318.62
  text "411522.033" at 186.5,-21.775 h5 r90
  text "758727.205" at 182.025,-21.975 h5 r90
Bottom Overlay:
  text "NetTie" at 68.6,15.525 h2
Mechanical 1:
  circle w0.254: c122.5,-20 r1.5
  circle w0.2: c58.164,4.1 r1.772
  circle w0.2: c58.163,10.648 r1.772
  circle w0.2: c81.8,-20.3 r2.28
  circle w0.2: c150.525,87.86 r2.28
  circle w0.2: c65,-18.5 r1.724
  circle w0.2: c65,-26.5 r1.772
  circle w0.2: c182.661,11 r1.724
  circle w0.2: c182.474,4.35 r1.772
  circle w0.2: c152.467,79.15 r1.722
  circle w0.2: c157.475,82.4 r1.703
  circle w0.254: c83,-30 r1.5
  circle w0.254: c92,-20 r1.5
  circle w0.254: c161,-30 r1.5
  circle w0.254: c152.5,-20 r1.5
  circle w0.254: c122.5,2 r1.5
  circle w0.254: c161,13 r1.5
  circle w0.254: c92,2 r1.5
  circle w0.254: c83,13 r1.5
  circle w0.013: c3,89 r1.5
  circle w0.013: c3,89 r1.5
  circle w0.013: c3,9 r1.5
  lines w0.013: 0,110 0,0 40,0 40,-40 190,-40 190,0.086 230,0 230,110 ; 0,110 230,110 ; 0,110 230,110 ; 3.7,103.3 cw(c3.7,105) 3.7,106.7 6.3,106.7 cw(c6.3,105) 6.3,103.3 3.7,103.3 ; 43.673,-33.7 cw(c43.673,-32) 43.673,-30.3 46.273,-30.3 cw(c46.273,-32) 46.273,-33.7 43.673,-33.7 ; 183.727,-33.7 cw(c183.727,-32) 183.727,-30.3 186.327,-30.3 cw(c186.327,-32) 186.327,-33.7 183.727,-33.7 ; 223.7,3.3 cw(c223.7,5) 223.7,6.7 226.3,6.7 cw(c226.3,5) 226.3,3.3 223.7,3.3 ; 223.7,103.309 cw(c223.7,105.009) 223.7,106.709 226.3,106.709 cw(c226.3,105.009) 226.3,103.309 223.7,103.309

## Text inside footprints (layer, text, board x,y; h text height)
C60: Top Overlay "+" at 218.165,26.527 h2 r90
C61: Top Overlay "+" at 22.7,60.5 h2
C62: Top Overlay "+" at 220.665,30.627 h2 r270
C63: Top Overlay "+" at 20.3,18.75 h2 r180